# Altium PCB CrashDAQ For Hammond 1554B.PcbDoc
Units mil, origin at the board's own origin, x right, y up, seen from the top; angles counter-clockwise.
Board outline 2300 x 1500 mil, 2 copper layers (Top Layer, Bottom Layer); 37 components, 49 nets, 210 pads, 0 vias.
Unrouted connection lines stored in the file: 129.
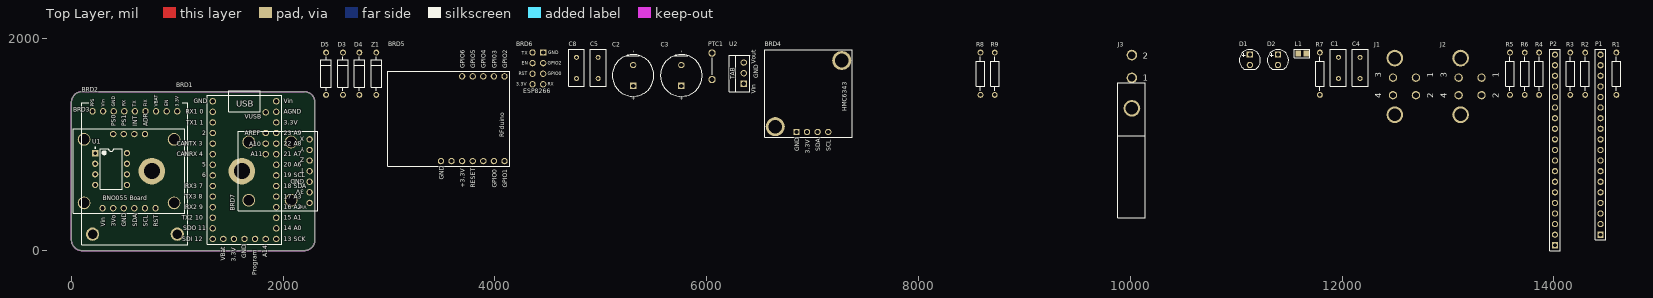
[diagram p0: Top Layer view]
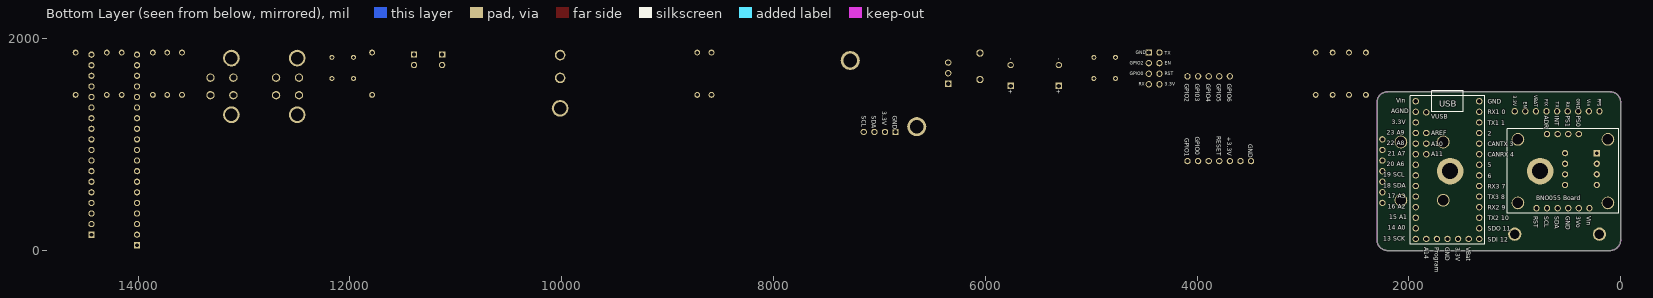
[diagram p1: Bottom Layer view, seen from below]

## Layer stack, top to bottom
Top Solder: solder mask 0.4, Solder Resist, Dk 3.5
Top Layer: signal copper 1.4
Dielectric 1: dielectric 12.6, FR-4, Dk 4.8
Bottom Layer: signal copper 1.4
Bottom Solder: solder mask 0.4, Solder Resist, Dk 3.5

## Board outline
0,100 0,1400 cw(c100,1400) 100,1500 2200,1500 cw(c2200,1400) 2300,1400 2300,100 cw(c2200,100) 2200,0 100,0 cw(c100,100)

## Design rules (kind name [scope] priority, off if disabled: settings)
Clearance [All] p1: gap=10
PolygonConnect [All] p1: connectstyle=Relief reliefconductorwidth=10 reliefentries=4 polygonreliefangle="90 Angle" airgapwidth=10
RoomDefinition TeensyCrashDAQ [InComponentClass('TeensyCrashDAQ')] p1: confinementstyle=ConfineIn formatcopy=TRUE lockcomponents=FALSE outline 2345,-10 16365,-10 16365,1980 2345,1980
RoutingVias [All] p1: holewidth=28 width=50 viastyle="Through Hole" minholewidth=28 minwidth=50 maxholewidth=28 maxwidth=50
SolderMaskExpansion [All] p1: expansion=4
Width [All] p1: maxlimit=10 minlimit=10 preferedwidth=10
30 further rules are at their usual default settings.

## Components (designator, comment, footprint, x,y, rotation, side; value= is the part's Value field where it differs from the comment)
BRD1 "Teensy 3.2" Teensy 1335,110 r0 top
BRD2 "Adafruit Ultimate GPS" GPS 1000,1395 r90 top
BRD3 "BNO055 IMU" "BNO055 Board" 545,750 r0 top
BRD4 "HMC6343 Compass" HMC6343 7375,1070 r90 top
BRD5 "RFD22102" "Simblee RFduino Adapter" 4090,845 r90 top
BRD6 "ESP8266" ESP8266 4355,1870 r0 top
BRD7 "AXDL377" "AXDL377 Breakout" 2325,375 r90 top
C1 "0.1uF" RAD-0.2 11965,1725 r90 top
C2 "330uF" "Elec. Cap 5 x 10mm" 5305,1555 r90 top
C3 "330uF" "Elec. Cap 5 x 10mm" 5760,1555 r90 top
C4 "0.1uF" RAD-0.2 12170,1725 r90 top
C5 "0.1uF" RAD-0.2 4975,1725 r90 top
C8 "0.1uF" RAD-0.2 4770,1725 r90 top
D1 "Green" "5mm Rad LED" 11130,1800 r0 top
D2 "Red" "5mm Rad LED" 11395,1800 r0 top
D3 "RK 16V1" DIODE-0.4 2565,1670 r90 top
D4 "RK 16V1" DIODE-0.4 2720,1670 r90 top
D5 "RK 16V1" DIODE-0.4 2405,1670 r90 top
J1 "4 Pos Mini-Fit Jr." "4 POS Vertical MINI-FIT JR" 12480,1550 r90 top
J2 "4 Pos Mini-Fit Jr." "4 POS Vertical MINI-FIT JR" 13100,1550 r90 top
J3 "39-30-1020" "2 pos Mini-Fit Jr. R/A Header" 10015,1630 r0 top
L1 "80 Ohms" 0805 11620,1860 r0 top
P1 "DNP" HDR1X18 14440,150 r90 top
P2 "DNP" HDR1X19 14010,50 r90 top
PTC1 "0.9 Amp POLYFUSE" PTC 6050,1740 r90 top
R1 "180k" Axial-0.4 14590,1670 r90 top
R2 "4.7k" Axial-0.4 14295,1670 r90 top
R3 "30k" Axial-0.4 14155,1670 r90 top
R4 "120" Axial-0.4 13860,1670 r90 top
R5 "4.7k" Axial-0.4 13585,1670 r90 top
R6 "4.7k" Axial-0.4 13725,1670 r90 top
R7 "4.7k" Axial-0.4 11790,1670 r90 top
R8 "4.7k" Axial-0.4 8585,1670 r90 top
R9 "1k" Axial-0.4 8720,1670 r90 top
U1 "MCP2562" PDIP300-P8 375,770 r0 top
U2 "OKI-78SR" 78xx 6350,1575 r90 top
Z1 "SMA6J" DIODE-0.4 2880,1670 r90 top

## Footprints (in the part's own frame and the unit in brackets; to place one, negate y for a bottom-side part, rotate by r counter-clockwise, add the part's x,y. Pads: shape width x height; smd on the part's side, far side on the other; paste and mask are expansions set on the pad)
"2 pos Mini-Fit Jr. R/A Header" [mm] "Molex 2 position Mini-Fit Jr. Right Angle Header with Pegs, Series 5569"
  round 4 hole 3: 0(0,-7.3)
  round 2.54 hole 1.803: 1(0,0) 2(0,5.5)
  silkscreen extent -3.43,-33.53 3.17,-1.1
"4 POS Vertical MINI-FIT JR" [mm] "Vertical Header"
  round 4 hole 3: 0(-6.8,-0.46) 0(6.8,-0.46)
  round 2 hole 1.4: 1(2.1,-5.5) 2(-2.1,-5.5) 3(2.1,0) 4(-2.1,0)
"5mm Rad LED" [mil]
  rect 60x60 hole 40: 1(-1.11,52.06)
  round 60 hole 40: 2(-1.11,-47.94)
  silkscreen extent -101,-88 99,98
78xx [mil] "Voltage regulator based on LM7805"
  rect 60x60 hole 40: 1(0,0)
  round 60 hole 40: 2(100,0) 3(200,0)
  silkscreen extent -73,-55 269,139
0805 [mm]
  rect 1.3x1.5 smd: 1(-0.899,0) 2(1.001,0)
  silkscreen extent -1.8,-1.02 1.91,1.02
"AXDL377 Breakout" [mil] "Adafruit ADXL377 - High-G Triple-Axis Accelerometer (+-200g Analog Out)"
  round 120 hole 100: 0(100,650) 0(100,250) 0(650,250) 0(650,650)
  round 60 hole 40: 1(75,75) 2(175,75) 3(275,75) 4(375,75) 5(475,75) 6(575,75) 7(675,75)
  silkscreen extent 0,0 750,750
Axial-0.4 [mm] "Axial Device, Thru-Hole; 2 Leads; 0.4 in Pin Spacing"
  round 1.4 hole 0.85: 1(-5.08,0) 2(5.08,0)
  silkscreen extent -4.06,-1.02 4.06,1.02
"BNO055 Board" [mil] "Adafruit Breakout Board for the BOSCH Sensortec BNO055"
  round 120 hole 100: 0(-425,-300) 0(-425,300) 0(425,-300) 0(425,300)
  round 60 hole 40: 1(-250,-350) 2(-150,-350) 3(-50,-350) 4(50,-350) 5(150,-350) 6(250,-350) 7(-150,350) 8(-50,350) 9(50,350) 10(150,350)
  silkscreen extent -525,-400 525,400
DIODE-0.4 [mm] "Diode, Thru-Hole; 2 Leads; 0.4 in Pin Spacing"
  round 1.4 hole 0.85: 1(-5.08,0) 2(5.08,0)
  silkscreen extent -4.06,-1.27 4.06,1.27
"Elec. Cap 5 x 10mm" [mil] "2 lead polarized Radial Capacitor with 5 mm lead spacing and 10 mm diameter can"
  rect 60x60 hole 40: 1(0,0)
  round 60 hole 40: 2(196.85,0)
  silkscreen extent -98,-197 295,197
ESP8266 [mil] "WiFi Module - ESP8266 Sparkfun"
  rect 60x60 hole 40: 1(100,0)
  round 60 hole 40: 2(0,0) 3(100,-100) 4(0,-100) 5(100,-200) 6(0,-200) 7(100,-300) 8(0,-300)
GPS [mil] "Adafruit Ultimate GPS Breakout"
  round 125 hole 90: 0(-1240,0) 0(-1240,800)
  round 60 hole 40: 1(-80,0) 2(-80,100) 3(-80,200) 4(-80,300) 5(-80,400) 6(-80,500) 7(-80,600) 8(-80,700) 9(-80,800)
  silkscreen extent -1340,-100 0,900
HDR1X18 [mm] "Connector; Header; 18 Position"
  rect 1.5x1.5 hole 0.9: 1(0,0)
  round 1.5 hole 0.9: 2(2.54,0) 3(5.08,0) 4(7.62,0) 5(10.16,0) 6(12.7,0) 7(15.24,0) 8(17.78,0) 9(20.32,0) 10(22.86,0) 11(25.4,0) 12(27.94,0) 13(30.48,0) 14(33.02,0) 15(35.56,0) 16(38.1,0) 17(40.64,0) 18(43.18,0)
  silkscreen extent -1.27,-1.27 44.45,1.27
HDR1X19 [mm] "Connector; Header; 19 Position"
  rect 1.5x1.5 hole 0.9: 1(0,0)
  round 1.5 hole 0.9: 2(2.54,0) 3(5.08,0) 4(7.62,0) 5(10.16,0) 6(12.7,0) 7(15.24,0) 8(17.78,0) 9(20.32,0) 10(22.86,0) 11(25.4,0) 12(27.94,0) 13(30.48,0) 14(33.02,0) 15(35.56,0) 16(38.1,0) 17(40.64,0) 18(43.18,0) 19(45.72,0)
  silkscreen extent -1.27,-1.27 46.99,1.27
HMC6343 [mil] "SparkFun HMC6343 Breakout  SEN-12916"
  round 180 hole 128: 0(100,728) 0(725,100)
  rect 60x60 hole 40: 1(50,528)
  round 60 hole 40: 2(50,428) 3(50,328) 4(50,228)
  silkscreen extent 0,0 828,828
PDIP300-P8 [mm] "DIP, 8-Leads, Row Spacing 7.62mm, Pitch 2.54mm, Body 9.5x6.6mm"
  rect 1.5x1.5 hole 0.9: 1(-3.81,3.81)
  round 1.5 hole 0.9: 2(-3.81,1.27) 3(-3.81,-1.27) 4(-3.81,-3.81) 5(3.81,-3.81) 6(3.81,-1.27) 7(3.81,1.27) 8(3.81,3.81)
  silkscreen extent -3.93,-4.9 2.65,5.23, body extent -3.55,-4.9 3.55,4.9, height 4.32
PTC [mil] "TE RGEF600-2"
  round 70 hole 45: 1(-125,0) 2(125,0)
  silkscreen extent -80,0 80,0
RAD-0.2 [mm] "Radial Cap, Thru-Hole; 2 Leads; 0.2 in Pin Spacing"
  round 1.2 hole 0.7: 1(-2.54,0) 2(2.54,0)
  silkscreen extent -4.44,-1.91 4.44,1.91
"Simblee RFduino Adapter" [mil] "Bluetooth / 802.15.1 Development Tools RFduino BLE 4.0 DIP (Arduino-Compatible)"
  round 60 hole 40: 1(0,0) 2(0,100) 3(0,200) 4(0,300) 5(0,400) 6(0,500) 7(0,600) 8(800,0) 9(800,100) 10(800,200) 11(800,300) 12(800,400)
  silkscreen extent -50,-50 850,1100
Teensy [mil] "32 bit Arduino Compatible Microcontroller www.pjrc.com/teensy"
  round 60 hole 40: 1(0,0) 2(0,100) 3(0,200) 4(0,300) 5(0,400) 6(0,500) 7(0,600) 8(0,700) 9(0,800) 10(0,900) 11(0,1000) 12(0,1100) 13(0,1200) 14(0,1300) 15(100,0) 16(200,0) 17(300,0) 18(400,0) 19(500,0) 20(600,0) 21(600,100) 22(600,200) 23(600,300) 24(600,400) 25(600,500) 26(600,600) 27(600,700) 28(600,800) 29(600,900) 30(600,1000) 31(600,1100) 32(600,1200) 33(600,1300) 34(500,1195) 35(500,1000) 36(500,900) 37(500,800)
  silkscreen extent -50,-50 650,1400

## Part data
BRD1: library part Teensy, "32 Bit Arduino-Compatible Microcontroller"
BRD2: library part "GPS - Adafruit"
BRD3: library part "BNO055 Board", "Adafruit BNO055 Sensor Breakout Board"
BRD4: library part HMC6343, "SparkFun HMC6343 Breakout  SEN-12916"
BRD5: library part "Simblee Adapter", "Bluetooth / 802.15.1 Development Tools RFduino BLE 4.0 DIP (Arduino-Compatible)"
BRD6: "Sparkfun ESP8266 Module (WRL-13678)"
BRD7: library part "AXDL377 Breakout", "Adafruit ADXL377 - High-G Triple-Axis Accelerometer (+-200g Analog Out)"
C1 C4 C5 C8: library part Cap, "CAP CER 0.1UF 50V 10% X7R 0603"
C2 C3: library part "SMD Elec", "CAP ALUM 330UF 20% 50V RADIAL"
D1: library part "LED - Green", "LED GREEN DIFFUSED 0805 SMD"
D2: library part "LED - SMD", "LED RED DIFFUSED 0805 SMD"
D3 D4 D5: library part "Schottky Diode", "DIODE SCHOTTKY 60V 2A AXIAL"
J1 J2: library part "4 Pos Header Vert", "CONN HEADER 4POS 4.2MM VERT TIN"
J3: library part "2 Pos Header"
L1: library part "Ferrite Bead", "Ferrite Bead 80ohms 100MHz 5A Monolithic 0805 SMD"
P1: library part "Header 18", "Header, 18-Pin"
P2: library part "Header 19", "Header, 19-Pin"
PTC1: library part PTC, "Resettable Fuses - PPTC 60V POLYFUSE .900A RADIAL LEADS"
R1 R3 R4 R8 R9: library part "Chip Resistor", "RES SMD 1K OHM 1% 1/10W 0603"
R2 R5 R6 R7: library part "Chip Resistor", "RES SMD 4.7K OHM 1% 1/8W 0805"
U1: library part MCP2551-I/P, "High-Speed CAN Transceiver, 8-Pin PDIP, Industrial Temperature"
U2: library part 7805, "5V DC/DC Converter (7805 replacement)"
Z1: library part "Zener - Bidirectional", "TVS DIODE 15VWM 24.4VC SMA"

## Free pads (board coordinates)
  round 250 hole 150: 0(760,750) 0(1610,750)

## Nets (pads, with @x,y where several pads share a name; then routed paths per layer and width w, separated by ;. In a path a pad name is that pad's centre, name@x,y a point inside that pad or via, vN(x,y) a via of type N, cw(c..) or ccw(c..) an arc to the next point about the centre after c; other vN are vias at no path point)
3V3: BRD1.16 BRD1.31 BRD4.2 BRD5.5 BRD6.8 P1.16 P2.4 R5.2 R6.2 R7.2 U1.5
5V0: BRD1.33 BRD2.8 BRD3.1 BRD7.1 C3.1 C5.2 D2.1 P2.2 U1.3 U2.3
12V0: C2.1 C8.2 D1.1 PTC1.2 R1.1 U2.1 Z1.1
CAN1H: J1.2 J2.2 R4.1 U1.7
CAN1L: J1.3 J2.3 R4.2 U1.6
GND: BRD1.14 BRD1.17 BRD2.7 BRD3.3 BRD4.1 BRD5.7 BRD6.1 BRD7.3 C1.1 C2.2 C3.2 C4.1 C5.1 C8.1 J1.4 J2.4 J3.2 L1.1 P1.1 P1.17 R2.1 R3.1 R8.1 R9.1 U1.2 U2.2 Z1.2
NetBRD1_1: BRD1.1 P1.14
NetBRD1_2: BRD1.2 P1.13
NetBRD1_3: BRD1.3 BRD5.2 P1.12
NetBRD1_4: BRD1.4 BRD5.1 P1.11
NetBRD1_5: BRD1.5 BRD6.7 P1.10
NetBRD1_6: BRD1.6 BRD6.2 P1.9
NetBRD1_7: BRD1.7 BRD3.9 P1.8
NetBRD1_8: BRD1.8 BRD2.4 P1.7
NetBRD1_9: BRD1.9 P1.6 U1.4
NetBRD1_10: BRD1.10 P1.5 U1.1
NetBRD1_11: BRD1.11 BRD2.9 P1.4
NetBRD1_12: BRD1.12 BRD2.6 P1.3
NetBRD1_13: BRD1.13 BRD2.5 P1.2
NetBRD1_15: BRD1.15 P1.15
NetBRD1_18: BRD1.18 P1.18
NetBRD1_19: BRD1.19 P2.19
NetBRD1_20: BRD1.20 BRD1.22 P2.13 P2.15
NetBRD1_21: BRD1.21 P2.14 R1.2 R3.2
NetBRD1_23: BRD1.23 P2.12
NetBRD1_24: BRD1.24 BRD7.5 P2.11
NetBRD1_25: BRD1.25 BRD3.4 BRD4.3 P2.10 R6.1
NetBRD1_26: BRD1.26 BRD3.5 BRD4.4 P2.9 R5.1
NetBRD1_27: BRD1.27 P2.8
NetBRD1_28: BRD1.28 P2.7
NetBRD1_29: BRD1.29 P2.6 R2.2 U1.8
NetBRD1_30: BRD1.30 P2.5
NetBRD1_32: BRD1.32 L1.2 P2.3
NetBRD1_34: BRD1.34 P2.1
NetBRD1_35: BRD1.35 BRD7.2 C1.2 C4.2 P2.16
NetBRD1_36: BRD1.36 BRD7.7 P2.17
NetBRD1_37: BRD1.37 BRD7.6 P2.18
NetBRD3_6: BRD3.6 BRD5.4 BRD6.6 R7.1
NetBRD5_8: BRD5.8
NetBRD5_9: BRD5.9
NetBRD5_10: BRD5.10
NetBRD5_11: BRD5.11
NetBRD7_4: BRD7.4
NetD1_2: D1.2 R8.2
NetD2_2: D2.2 R9.2
NetD3_2: D3.2 D4.2 D5.2 PTC1.1
RAW0: D3.1 J1.1
RAW1: D4.1 J2.1
RAW2: D5.1 J3.1
pads on no net: BRD2.0 BRD2.1 BRD2.2 BRD2.3 BRD3.0 BRD3.2 BRD3.7 BRD3.8 BRD3.10 BRD4.0 BRD5.3 BRD5.6 BRD5.12 BRD6.3 BRD6.4 BRD6.5 BRD7.0 J1.0 J2.0 J3.0

## Keep-outs
Keep-Out Layer:
  the board outline again, w5

## Text inside footprints (layer, text, board x,y; h text height)
BRD1: Top Overlay "A11" at 1694.98,890 h40; Top Overlay "A10" at 1681.65,985 h40; Top Overlay "AREF" at 1635,1090 h40; Top Overlay "VUSB" at 1635,1245 h40; Top Overlay "Vin" at 2005,1390 h40; Top Overlay "AGND" at 2005,1290 h40; Top Overlay "3.3V" at 2005,1190 h40; Top Overlay "23 A9" at 2005,1090 h40; Top Overlay "22 A8" at 2005,990 h40; Top Overlay "21 A7" at 2005,890 h40; Top Overlay "20 A6" at 2005,790 h40; Top Overlay "19 SCL" at 2005,690 h40; Top Overlay "18 SDA" at 2005,590 h40; Top Overlay "17 A3" at 2005,490 h40; Top Overlay "16 A2" at 2005,390 h40; Top Overlay "15 A1" at 2005,290 h40; Top Overlay "14 A0" at 2005,190 h40; Top Overlay "13 SCK" at 2005,90 h40; Top Overlay "A14" at 1850,-65.01 h40 r90; Top Overlay "Program" at 1751.25,-231.63 h40 r90; Top Overlay "GND" at 1652.5,-71.68 h40 r90; Top Overlay "3.3V" at 1553.75,-105 h40 r90; Top Overlay "VBat" at 1455,-98.34 h40 r90; Top Overlay "SDO 11" at 1055.01,190 h40; Top Overlay "SDI 12" at 1048.34,90 h40; Top Overlay "RX2 9" at 1075,390 h40; Top Overlay "TX2 10" at 1041.68,290 h40; Top Overlay "TX3 8" at 1075,490 h40; Top Overlay "RX3 7" at 1075,590 h40; Top Overlay "6" at 1234.95,690 h40; Top Overlay "5" at 1234.95,790 h40; Top Overlay "CANRX 4" at 995.03,890 h40; Top Overlay "CANTX 3" at 995.03,990 h40; Top Overlay "2" at 1234.95,1090 h40; Top Overlay "TX1 1" at 1085,1190 h40; Top Overlay "RX1 0" at 1081.66,1290 h40; Top Overlay "GND" at 1154.97,1390 h40; Top Overlay "USB" at 1555,1360 h60; Bottom Overlay "USB" at 1715,1360 h60; Bottom Overlay "VUSB" at 1786.62,1245 h40; Bottom Overlay "AREF" at 1786.62,1090 h40; Bottom Overlay "A10" at 1786.62,985 h40; Bottom Overlay "A11" at 1786.62,890 h40; Bottom Overlay "CANTX 3" at 1256.61,985 h40; Bottom Overlay "CANRX 4" at 1256.61,885 h40; Bottom Overlay "GND" at 1256.61,1385 h40; Bottom Overlay "RX1 0" at 1256.61,1285 h40; Bottom Overlay "RX3 7" at 1256.61,585 h40; Bottom Overlay "TX3 8" at 1256.61,485 h40; Bottom Overlay "SDI 12" at 1256.61,85 h40; Bottom Overlay "SDO 11" at 1256.61,185 h40; Bottom Overlay "TX1 1" at 1256.61,1185 h40; Bottom Overlay "RX2 9" at 1256.61,385 h40; Bottom Overlay "TX2 10" at 1256.61,285 h40; Bottom Overlay "2" at 1256.61,1085 h40; Bottom Overlay "5" at 1256.61,785 h40; Bottom Overlay "6" at 1256.61,685 h40; Bottom Overlay "Program" at 1756.24,31.63 h40 r90; Bottom Overlay "A14" at 1854.99,31.63 h40 r90; Bottom Overlay "VBat" at 1459.99,31.63 h40 r90; Bottom Overlay "GND" at 1657.49,31.63 h40 r90; Bottom Overlay "3.3V" at 1558.74,31.63 h40 r90; Bottom Overlay "22 A8" at 2206.61,995 h40; Bottom Overlay "20 A6" at 2206.61,795 h40; Bottom Overlay "18 SDA" at 2239.93,595 h40; Bottom Overlay "13 SCK" at 2239.93,95 h40; Bottom Overlay "23 A9" at 2206.61,1095 h40; Bottom Overlay "19 SCL" at 2239.93,695 h40; Bottom Overlay "16 A2" at 2199.94,395 h40; Bottom Overlay "Vin" at 2119.97,1395 h40; Bottom Overlay "3.3V" at 2159.95,1195 h40; Bottom Overlay "AGND" at 2166.62,1295 h40; Bottom Overlay "21 A7" at 2199.94,895 h40; Bottom Overlay "17 A3" at 2199.94,495 h40; Bottom Overlay "14 A0" at 2199.94,195 h40; Bottom Overlay "15 A1" at 2186.61,295 h40
BRD2: Top Overlay "PPS" at 215,1360 h30 r90; Top Overlay "Vin" at 315,1360 h30 r90; Top Overlay "GND" at 415,1360 h30 r90; Top Overlay "RX" at 515,1365 h30 r90; Top Overlay "TX" at 615,1360 h30 r90; Top Overlay "FIX" at 715,1360 h30 r90; Top Overlay "VBAT" at 815,1360 h30 r90; Top Overlay "EN" at 915,1365 h30 r90; Top Overlay "3.3V" at 1015,1360 h30 r90; Bottom Overlay "VBAT" at 815,1464.96 h30 r90; Bottom Overlay "FIX" at 715,1429.98 h30 r90; Bottom Overlay "GND" at 415,1434.97 h30 r90; Bottom Overlay "Vin" at 315,1429.98 h30 r90; Bottom Overlay "3.3V" at 1015,1459.97 h30 r90; Bottom Overlay "EN" at 915,1404.98 h30 r90; Bottom Overlay "TX" at 615,1404.98 h30 r90; Bottom Overlay "RX" at 515,1404.98 h30 r90; Bottom Overlay "PPS" at 215,1434.97 h30 r90
BRD3: Top Overlay "BNO055 Board" at 295,475 h40; Top Overlay "RST" at 820,225 h40 r90; Top Overlay "SCL" at 720,225 h40 r90; Top Overlay "SDA" at 620,225 h40 r90; Top Overlay "GND" at 520,225 h40 r90; Top Overlay "Vin" at 320,225 h40 r90; Top Overlay "3Vo" at 420,225 h40 r90; Top Overlay "INT" at 620,1175 h40 r90; Top Overlay "ADR" at 720,1175 h40 r90; Top Overlay "PS1" at 520,1175 h40 r90; Top Overlay "PS0" at 420,1175 h40 r90; Bottom Overlay "BNO055 Board" at 795,475 h40; Bottom Overlay "RST" at 820,325 h40 r90; Bottom Overlay "SCL" at 720,325 h40 r90; Bottom Overlay "SDA" at 620,325 h40 r90; Bottom Overlay "GND" at 520,325 h40 r90; Bottom Overlay "Vin" at 320,325 h40 r90; Bottom Overlay "3Vo" at 420,325 h40 r90; Bottom Overlay "INT" at 620,1275 h40 r90; Bottom Overlay "ADR" at 720,1275 h40 r90; Bottom Overlay "PS1" at 520,1275 h40 r90; Bottom Overlay "PS0" at 420,1275 h40 r90
BRD4: Top Overlay "SCL" at 7172,940 h40 r90; Top Overlay "SDA" at 7072,940 h40 r90; Top Overlay "3.3V" at 6972,915 h40 r90; Top Overlay "GND" at 6872,940 h40 r90; Top Overlay "HMC6343" at 7322,1315 h40 r90; Bottom Overlay "GND" at 6872,1275 h40 r90; Bottom Overlay "SCL" at 7167,1275 h40 r90; Bottom Overlay "3.3V" at 6972,1315 h40 r90; Bottom Overlay "SDA" at 7072,1275 h40 r90
BRD5: Top Overlay "GND" at 3515,670 h40 r90; Top Overlay "+3.3V" at 3715,595 h40 r90; Top Overlay "GPIO0" at 4015,595 h40 r90; Top Overlay "RESET" at 3815,595 h40 r90; Top Overlay "GPIO1" at 4115,595 h40 r90; Top Overlay "GPIO2" at 4115,1720 h40 r90; Top Overlay "GPI03" at 4015,1720 h40 r90; Top Overlay "GPIO4" at 3915,1720 h40 r90; Top Overlay "GPIO5" at 3815,1720 h40 r90; Top Overlay "GPIO6" at 3715,1720 h40 r90; Top Overlay "RFduino" at 4090,1070 h40 r90; Bottom Overlay "RESET" at 3815,1081.61 h40 r90; Bottom Overlay "GND" at 3515,1001.63 h40 r90; Bottom Overlay "GPIO0" at 4015,1074.94 h40 r90; Bottom Overlay "GPIO1" at 4115,1061.61 h40 r90; Bottom Overlay "+3.3V" at 3715,1074.94 h40 r90; Bottom Overlay "GPIO4" at 3915,1574.94 h40 r90; Bottom Overlay "GPIO5" at 3815,1574.94 h40 r90; Bottom Overlay "GPI03" at 4015,1574.94 h40 r90; Bottom Overlay "GPIO2" at 4115,1574.94 h40 r90; Bottom Overlay "GPIO6" at 3715,1574.94 h40 r90
BRD6: Top Overlay "GND" at 4505,1855 h30; Top Overlay "GPIO2" at 4500,1755 h30; Top Overlay "GPIO0" at 4500,1655 h30; Top Overlay "RX" at 4500,1555 h30; Top Overlay "3.3V" at 4200,1555 h30; Top Overlay "RST" at 4224.99,1655 h30; Top Overlay "EN" at 4254.98,1755 h30; Top Overlay "TX" at 4254.98,1850 h30; Bottom Overlay "GPIO2" at 4634.96,1755 h30; Bottom Overlay "GPIO0" at 4634.96,1655 h30; Bottom Overlay "GND" at 4579.97,1855 h30; Bottom Overlay "RX" at 4549.98,1555 h30; Bottom Overlay "TX" at 4304.97,1850 h30; Bottom Overlay "EN" at 4304.97,1755 h30; Bottom Overlay "RST" at 4304.97,1655 h30; Bottom Overlay "3.3V" at 4304.97,1555 h30
BRD7: Top Overlay "Vin" at 2225,425 h30 r180; Top Overlay "3V" at 2200,575 h40 r180; Top Overlay "GND" at 2200,675 h40 r180; Top Overlay "T" at 2200,775 h40 r180; Top Overlay "Z" at 2200,875 h40 r180; Top Overlay "Y" at 2200,975 h40 r180; Top Overlay "X" at 2200,1075 h40 r180
C2: Top Overlay "-" at 5325,1870 h40 r90; Top Overlay "+" at 5325,1415 h40 r90; Bottom Overlay "+" at 5325,1475 h40 r90; Bottom Overlay "-" at 5325,1795 h40 r90
C3: Top Overlay "-" at 5780,1870 h40 r90; Top Overlay "+" at 5780,1415 h40 r90; Bottom Overlay "+" at 5780,1475 h40 r90; Bottom Overlay "-" at 5780,1795 h40 r90
J1: Top Overlay "1" at 12860,1630 h60 r90; Top Overlay "3" at 12370,1630 h60 r90; Top Overlay "4" at 12370,1440 h60 r90; Top Overlay "2" at 12860,1440 h60 r90
J2: Top Overlay "1" at 13480,1630 h60 r90; Top Overlay "3" at 12990,1630 h60 r90; Top Overlay "4" at 12990,1440 h60 r90; Top Overlay "2" at 13480,1440 h60 r90
J3: Top Overlay "2" at 10115,1810 h60; Top Overlay "1" at 10115,1605 h60
U2: Top Overlay "GND" at 6485,1628 h40 r90; Top Overlay "Vout" at 6462,1764 h40 r90; Top Overlay "TAB" at 6263,1618 h40 r90; Top Overlay "Vin" at 6461,1482 h40 r90